# Altium PCB CT310高端控制盒核心板电路V1.2.PcbDoc (part 3 of 4)
Units mil, origin at the board's own origin, x right, y up, seen from the top; angles counter-clockwise.
Board outline 3735.76 x 4625 mil, 2 copper layers (TOP, BOTTOM), stack 10.4 mil thick; 194 components, 362 nets, 1084 pads, 348 vias.
Unrouted connection lines stored in the file: 16.
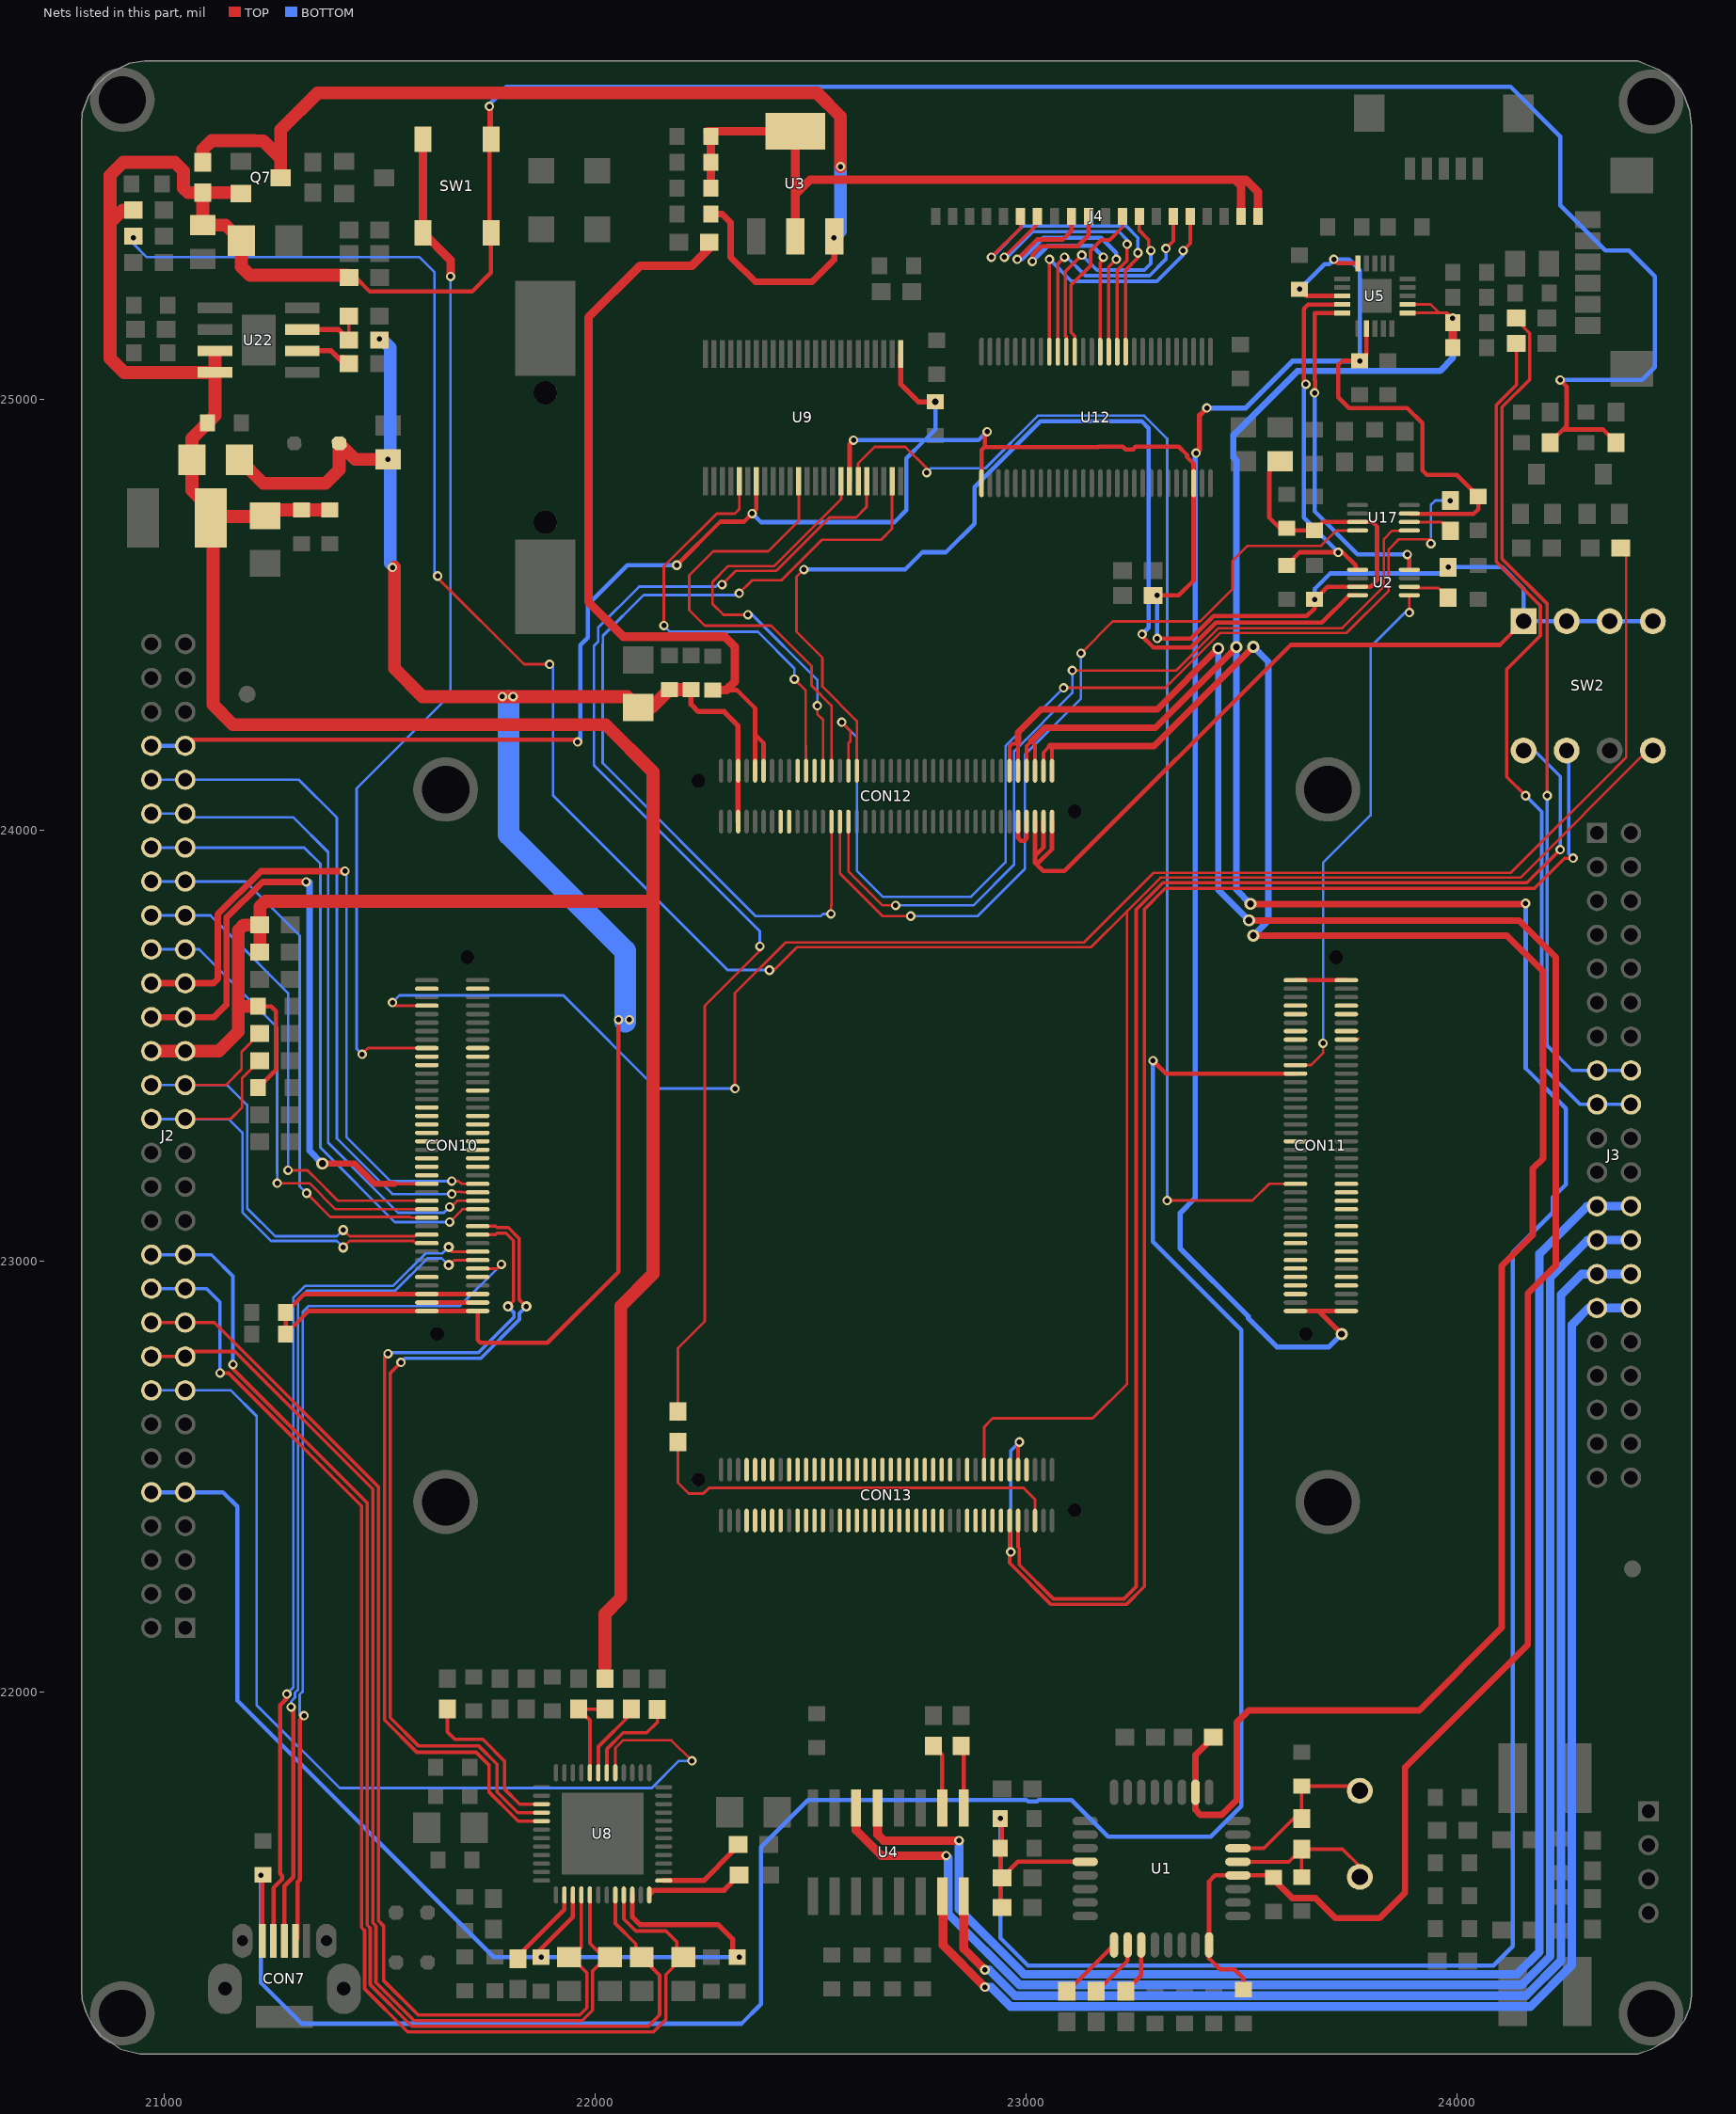
[diagram p3: the nets of this part, all layers, seen from the top]

## Via types
v1: diameter 22, hole 12, TOP to BOTTOM, tented both sides, 194 vias
v2: diameter 22, hole 12, TOP to BOTTOM, 92 vias
v3: diameter 28, hole 16, TOP to BOTTOM, 37 vias
v4: diameter 24, hole 12, TOP to BOTTOM, 17 vias
v5: diameter 50, hole 30, TOP to BOTTOM, tented both sides, 4 vias
v6: diameter 30, hole 20, TOP to BOTTOM, tented both sides, 3 vias
v7: diameter 40, hole 24, TOP to BOTTOM, 1 vias

## Nets (pads, with @x,y where several pads share a name; then routed paths per layer and width w, separated by ;. In a path a pad name is that pad's centre, name@x,y a point inside that pad or via, vN(x,y) a via of type N, cw(c..) or ccw(c..) an arc to the next point about the centre after c; other vN are vias at no path point) (continued)
NetR16_2: R16.2 U1.27 | length 122.4
  TOP w10: R16.2@23231.67,21305.43 23267.76,21341.52 U1.27@23267.76,21412.83
NetR17_1: R17.1 U1.26 | length 138.8
  TOP w10: R17.1@23163.33,21305.43 23165.43,21305.43 23236.26,21376.26 U1.26@23236.26,21412.83
NetR18_1: R18.1 U1.25 | length 154.3
  TOP w10: R18.1@23095,21305.43 23097.36,21305.43 U1.25@23204.76,21412.83
NetR20_2: R20.2 U4.9 | length 146.4
  TOP w10: R20.2@22850,21874.57 22855.96,21868.61 U4.9@22855.96,21730.67
NetR21_2: R21.2 U4.10 | length 152.6
  TOP w10: R21.2@22785,21874.57 22805.96,21853.61 U4.10@22805.96,21730.67
NetR22_2: R22.2 U17.6 | length 103.5
  TOP w6: U17.6@23890.04,24715.16 23964.41,24715.16 R22.2@23985,24694.57
NetR25_1: R25.1 U9.44 | length 2871.7
  TOP w6: R25.1@22192.85,22632.07 22192.85,22797.85 22255,22860 22255,23592.16 22382.85,23720.01 v2(22382.85,23730.57) ; 22303,24578 22327,24602 22420.64,24602 22544.75,24726.11 22606.11,24726.11 22630.5,24750.5 U9.44@22630.5,24810
  BOTTOM w6: v1(22295,24570) 22290,24575 22280.57,24565.57 22102.85,24565.57 22007.5,24470.22 22007.5,24437.29 21997.85,24427.65 21997.85,24150.57 22382.85,23765.57 v2(22382.85,23730.57)
NetR31_1: R31.1 R45.1 U8.32 | length 219.5
  TOP w8: U8.32@21988.33,21812.3 21988.33,21934.13 R45.1@21962.32,21960.14 R31.1@22023.21,21960.14
NetR33_1: R33.1 U8.2 | length 191.4
  TOP w10: R33.1@21817.85,21383.57 21929.27,21494.99 U8.2@21929.27,21528.84
NetR36_2: R36.2 U8.30 | length 227.9
  TOP w8: U8.30@22027.7,21812.3 22027.7,21867.38 22065.31,21905 22120,21905 22145,21930 R36.2@22145,21959.57
NetR39_2: R39.2 U8.13 | length 190.9
  TOP w12: U8.13@22159.59,21562.3 22252.3,21562.3 R39.2@22321.71,21631.71
NetR41_2: R41.2 U8.12 | length 226
  TOP w12: U8.12@22126.12,21528.84 22137.28,21540 22300,21540 R41.2@22333.57,21573.57
NetR42_2: R42.2 U8.31 | length 179.4
  TOP w8: U8.31@22008.01,21812.3 22008.01,21873.01 22084.11,21949.11 R42.2@22084.11,21960.14
NetR44_2: R44.2 U8.39 | length 357.7
  TOP w8: R44.2@21657.85,21960.14 21657.85,21907.15 21675,21890 21740,21890 21790,21840 21790,21775 21825.53,21739.47 21855,21739.47
NetR48_2: R48.2 U2.6 | length 100.6
  TOP w6: U2.6@23890.04,24565.16 23893.2,24562 23957.57,24562 R48.2@23980,24539.57
NetR131_2: R131.2 R135.1 U22.7 | length 173.7
  TOP w8: R131.2@21429,25137.85 R135.1@21429,25192.85
  TOP w12: U22.7@21320.49,25162.35 21404.5,25162.35 R131.2@21429,25137.85
NetR133_1: R133.1 U22.6 | length 140.5
  TOP w12: U22.6@21320.49,25112.35 21387.65,25112.35 R133.1@21425,25075 ; R133.1@21414.5,25097.35 R133.1@21429,25082.85
PWRDN_VCM: CON11.50 U9.43 | length 2963.6
  TOP w6: U9.43@22610.8,24810 22610.8,24851.5 22648.94,24889.64 22720.36,24889.64 22770,24840 v1(22770,24830) ; v2(23327.85,23140.57) 23525.88,23140.57 23564.63,23179.31 CON11.50@23625.65,23179.31
  BOTTOM w6: v1(22770,24830) 22780,24840 22906.11,24840 23028.11,24962 23274.46,24962 23327.85,24908.61 v2(23327.85,23140.57)
PWRON: CON10.63 SW1.3 SW1.4 | length 2402.3
  TOP w6: v2@21458.64,23480 21472.92,23494.28 CON10.63@21609.9,23494.28
  TOP w20: SW1.3@21601.26,25603.27 SW1.4@21601.26,25386.73 21665,25322.99 v1(21665,25285)
  BOTTOM w6: v2(21460,23480) 21447.21,23492.79 21447.21,24097.21 21665,24315 v1(21665,25285)
RS232_RXD1: J3.23 J3.24 U4.13 | length 3724.8
  TOP w20: U4.13@22655.96,21730.67 22655.96,21669.04 22670,21655 v1(22845,21655)
  BOTTOM w20: v1(22845,21655) 22845,21495.71 22995.71,21345 24140,21345 24192.01,21397.01 24192.01,23017.01 24302.31,23127.31 J3.23@24325.63,23127.31 J3.24@24404.37,23127.31
RS232_RXD2: J3.27 J3.28 U4.8 | length 3314.7
  TOP w20: U4.8@22855.96,21525.95 22855.96,21404.04 v1(22905,21355)
  BOTTOM w20: v1(22905,21355) 22915,21355 22975,21295 24160.71,21295 24242.01,21376.3 24242.01,22922.01 24289.83,22969.83 J3.27@24325.63,22969.83 J3.28@24404.37,22969.83
RS232_TXD1: J3.25 J3.26 U4.14 | length 3713.5
  TOP w20: U4.14@22605.96,21730.67 22605.96,21679.04 22665,21620 v1(22815,21620)
  BOTTOM w20: v1(22815,21620) 22820,21615 22820,21485.36 22985.36,21320 24150.36,21320 24217.01,21386.65 24217.01,22962.01 24303.57,23048.57 J3.25@24325.63,23048.57 J3.26@24404.37,23048.57
RS232_TXD2: J3.29 J3.30 U4.7 | length 3312
  TOP w20: U4.7@22805.96,21525.95 22807.69,21524.22 22807.69,21412.31 v1(22905,21315)
  BOTTOM w20: v1(22905,21315) 22919.64,21315 22964.64,21270 24171.07,21270 24267.01,21365.94 24267.01,22852.01 24306.09,22891.09 J3.29@24325.63,22891.09 J3.30@24404.37,22891.09
RX+: J2.19 J2.20 R34.1 U8.4 | length 2635
  TOP w8: J2.20@20970.63,22857.3 J2.19@21049.37,22857.3 21116.63,22857.3 21497.4,22476.53 21497.4,21469.43 21509.46,21457.36 21509.46,21330.54 21590,21250 21965,21250 21981.56,21266.56 21981.56,21347.81 21945,21384.37 21968.64,21408.01 U8.4@21968.64,21528.84
RX-: J2.17 J2.18 R35.1 U8.5 | length 2649.1
  TOP w8: J2.18@20970.63,22778.56 J2.17@21049.37,22778.56 21060.81,22790 21165,22790 21484.4,22470.6 21484.4,21464.04 21491.59,21456.85 21491.59,21325.77 21580.36,21237 21970.38,21237 21994.56,21261.17 21994.56,21352.26 22026.67,21384.37 22020,21384.37 21988.33,21416.04 U8.5@21988.33,21528.84
RXCLK+: J4.15 U12.39 | length 780.3
  TOP w8: v1(22920,25330) 22987.83,25397.83 J4.15@22987.83,25425 ; U12.39@23231.75,25110.52 23231.75,25300.08 23260,25328.33 v1(23260,25340)
  BOTTOM w8: v1(22920,25330) 22921.72,25330 22993.72,25402 23233,25402 23260,25375 v1(23260,25340)
RXCLK-: J4.14 U12.40 | length 713.3
  TOP w8: v1(22950,25330) 23027.2,25407.2 J4.14@23027.2,25425 ; U12.40@23212.07,25110.52 23212.07,25298.78 23235,25321.72 v1(23235,25360)
  BOTTOM w8: v1(22950,25330) 22956.72,25330 23015.72,25389 23216,25389 23235,25370 v1(23235,25360)
RXIN0+: J4.6 U12.47 | length 601.7
  TOP w8: U12.47@23074.27,25110.52 23074.27,25314.27 v1(23090,25330) ; v1(23325,25350) 23342.17,25367.17 J4.6@23342.17,25425
  BOTTOM w8: v1(23090,25330) 23095,25330 23138,25287 23287,25287 23325,25325 v1(23325,25350)
RXIN0-: J4.5 U12.48 | length 667.9
  TOP w8: U12.48@23054.59,25110.52 23054.59,25324.59 v1(23055,25325) ; v1(23365,25345) 23381.54,25361.54 J4.5@23381.54,25425
  BOTTOM w8: v1(23055,25325) 23106,25274 23304,25274 23365,25335 v1(23365,25345)
RXIN1+: J4.9 U12.45 | length 379.1
  TOP w8: U12.45@23113.64,25110.52 23113.64,25146.86 23105,25155.5 23105,25265 23150,25310 23150,25345 23175,25370 23195,25370 23224.06,25399.06 J4.9@23224.06,25425
RXIN1-: J4.8 U12.46 | length 545.7
  TOP w8: U12.46@23093.96,25110.52 23093.96,25145 23092,25146.96 23092,25297 v1(23130,25335) ; J4.8@23263.43,25425 23263.43,25391.57 23285,25370 23285,25345 v1(23290,25345)
  BOTTOM w8: v1(23130,25335) 23165,25300 23275,25300 23290,25315 v1(23290,25345)
RXIN2+: J4.12 U12.41 | length 689.3
  TOP w8: U12.41@23192.38,25110.52 23192.38,25307.38 v1(23210,25325)
  TOP w10: v1(22980,25325) 23026,25371 23086,25371 23105.94,25390.94 J4.12@23105.94,25425
  BOTTOM w10: v1(22980,25325) 22990.3,25325 23040.3,25375 23175,25375 23210,25340 v1(23210,25325)
RXIN2-: J4.11 U12.42 | length 622
  TOP w8: U12.42@23172.7,25110.52 23172.7,25317.7 23180,25325 v1(23180,25330)
  TOP w10: v1(23015,25320) 23015,25335 23035,25355 23120,25355 23145.31,25380.31 J4.11@23145.31,25425
  BOTTOM w10: v1(23015,25320) 23051,25356 23154,25356 v1(23180,25330)
SIM_DET: CON10.54
SPEED: J2.15 J2.16 U8.29 | length 2317.8
  TOP w6: U8.29@22047.38,21812.3 22047.38,21870.1 22064.85,21887.57 22177.43,21887.57 v2(22225,21840)
  BOTTOM w6: J2.16@20970.63,22699.82 J2.15@21049.37,22699.82 21155.18,22699.82 21215,22640 21215,21969.54 21407.54,21777 22132,21777 22195,21840 v2(22225,21840)
STM_LCD_ONOFF: J3.15 J3.16 R51.1 | length 1989.4
  TOP w8: R51.1@24138.48,25188.33 24138.48,25184.07 24169.13,25153.41 24169.13,25045.76 24105,24981.63 24105,24630 24210,24525 v1(24210,24080)
  BOTTOM w8: v1(24210,24080) 24210,23500 24267.73,23442.27 J3.15@24325.63,23442.27 J3.16@24404.37,23442.27
STM_LCD_PWM: J3.17 J3.18 R52.1 | length 2034.9
  TOP w8: R52.1@24138.48,25116.09 24138.48,25033.49 24092,24987.01 24092,24623 24194,24521 24194,24451.27 24116,24373.27 24116,24124 v1(24160,24080)
  BOTTOM w8: v1(24160,24080) 24197,24043 24197,23453 24286.47,23363.53 J3.17@24325.63,23363.53 J3.18@24404.37,23363.53
TP1_EN: CON12.50 R22.1 | length 2544.2
  TOP w6: v2(22572.85,24250.57) 22592.85,24230.57 22592.85,24206.26 22588.25,24201.65 CON12.50@22588.25,24137.98 ; v2(23087.85,24330.57) 23323.96,24330.57 23451.39,24458 23744.62,24458 23842,24555.38 23842,24652 23865,24675 v1@23940,24675 ; v1(23940,24665) v1@23945,24670 ; v1(23985,24765) R22.1@23985,24765.43
  BOTTOM w6: v2(22572.85,24250.57) 22607.85,24215.57 22607.85,23905.57 22667.85,23845.57 22872.85,23845.57 22952.85,23925.57 22952.85,24195.57 v2(23087.85,24330.57) ; v1(23940,24665) 23940,24755 23950,24765 v1(23985,24765)
TP1_INT: CON12.48 U2.4 | length 2582.1
  TOP w6: v1(22485,24605) 22467.85,24587.85 22467.85,24460.57 22527.85,24400.57 22527.85,24333.6 22607.93,24253.53 CON12.48@22607.93,24137.98
  TOP w10: v1(23270,24455) 23270,24450.3 23296.3,24424 23383.45,24424 23441.45,24482 23687,24482 23750.47,24545.47 U2.4@23769.96,24545.47
  BOTTOM w10: v1(22485,24605) 22720,24605 22760,24645 22814.7,24645 22881,24711.3 22881,24796.5 23033.5,24949 23269.08,24949 23285,24933.08 23285,24554.7 23284,24553.7 23284,24536.3 23285,24535.3 23285,24470 v1(23270,24455)
TP_IOCTL: CON12.53 U9.47 | length 2074.1
  TOP w6: v1(22335,24550) 22365,24580 22433.13,24580 22527.13,24674 22664,24674 22689.54,24699.54 U9.47@22689.54,24810 ; v2(22547.85,23805.57) 22547.85,23825.07 22548.88,23826.1 CON12.53@22548.88,24019.86
  BOTTOM w6: v1(22335,24550) 22330.57,24545.57 22112.85,24545.57 22018.5,24451.22 22018.5,24432.74 22017.85,24432.09 22017.85,24155.57 22372.85,23800.57 22523.85,23800.57 22528.85,23805.57 v2(22547.85,23805.57)
TSC_IRQ: C40.1 U2.1 U5.4 | length 903.4
  TOP w10: C40.1@23605,24614.37 23635.63,24645 v1(23725,24645) 23735,24645 23765,24615 23765,24609.49 U2.1@23769.96,24604.53 ; v1(23650,25035) 23645,25040 23645,25210 23655.32,25220.32 U5.4@23734.21,25220.32
  BOTTOM w10: v1(23650,25035) 23645,25040 23645,24725 v1(23725,24645)
TSC_RST: U2.8 U5.5 | length 808.3
  TOP w10: v1@23671,25015 23671,25043.7 23670.63,25044.07 23670.63,25200.63 U5.5@23734.21,25200.63 ; v1(23885,24640) 23890.04,24634.96 U2.8@23890.04,24604.53
  BOTTOM w10: v1@23670,25005 23670,24740 23770,24640 v1(23885,24640)
  other v1: 23670,25015
TX+: J2.23 J2.24 R37.1 U8.8 | length 3024.5
  TOP w8: v1(21160,22760) 21160,22750 21471.4,22438.6 21471.4,21458.66 21478.59,21451.46 21478.59,21320.38 21574.98,21224 22124,21224 22150,21250 22150,21342.7 R37.1@22108.33,21384.37 ; U8.8@22047.38,21528.84 22047.38,21462.62 22095,21415 R37.1@22095,21384.37
  BOTTOM w8: J2.24@20970.63,23014.78 J2.23@21049.37,23014.78 21110.22,23014.78 21160,22965 v1(21160,22760)
TX-: J2.21 J2.22 R38.1 U8.9 | length 3067.1
  TOP w8: v1(21130,22740) 21150,22740 21458.4,22431.6 21458.4,21453.27 21465.59,21446.08 21465.59,21311.02 21565.62,21211 22136,21211 22165,21240 22165,21344.37 R38.1@22205,21384.37 ; U8.9@22067.07,21528.84 22067.07,21472.93 22095,21445 22165,21445 22190,21420 R38.1@22190,21384.37
  BOTTOM w8: J2.22@20970.63,22936.04 J2.21@21049.37,22936.04 21098.96,22936.04 21130,22905 v1(21130,22740)
UART_RING: CON12.58
UH_DM2: CON10.22 U8.40 | length 1941.1
  TOP w8: v1(21550,22765) 21525,22740 21525,21940 21590,21875 21730,21875 21772.71,21832.29 21772.71,21767.71 21820.64,21719.78 U8.40@21876.12,21719.78 ; CON10.22@21728.01,23080.88 21769.83,23080.88 21773.17,23077.54 21798.88,23077.54 21823.85,23052.57 21823.85,22911.57 v4(21840.85,22894.57)
  BOTTOM w8: v1(21550,22765) 21559.57,22774.57 21735.24,22774.57 21824.85,22864.19 21824.85,22878.57 v4(21840.85,22894.57)
UH_DM3: CON10.19 J2.33 J2.34 R120.2 | length 1187.2
  TOP w6: J2.33@21049.37,23408.48 21143.48,23408.48 21180,23445 21180,23485.86 R120.2@21222.42,23528.29 ; v4(21415.85,23072.32) 21430.61,23057.57 21582.91,23057.57 21583.91,23058.57 21584.41,23058.57 21589.41,23063.57 21607.53,23063.57 CON10.19@21609.9,23061.21
  BOTTOM w6: J2.34@20970.63,23408.48 J2.33@21049.37,23408.48 21146.52,23408.48 21193,23362 21193,23122.56 21257.99,23057.57 21401.1,23057.57 v4(21415.85,23072.32)
UH_DP2: CON10.20 U8.41 | length 1949.9
  TOP w8: v1(21520,22785) 21512,22777 21512,21934.62 21586.62,21860 21724.5,21860 21754,21830.5 21754,21768.04 21754.66,21767.38 21810,21712.04 21821.94,21700.1 U8.41@21876.12,21700.1 ; CON10.20@21728.01,23061.21 21769.83,23061.21 21773.17,23064.54 21793.5,23064.54 21810.85,23047.19 21810.85,22907.23 v4(21798.2,22894.57)
  BOTTOM w8: v1@21527.43,22787.57 21729.85,22787.57 21811.85,22869.57 21811.85,22880.91 v4(21798.2,22894.57)
UH_DP3: CON10.17 J2.31 J2.32 R119.2 | length 1148.3
  TOP w6: J2.31@21049.37,23329.74 21049.63,23330 21155,23330 21181.03,23356.03 21181.03,23423.97 R119.2@21222.42,23465.36 ; v4(21415.85,23031.82) 21430.6,23046.57 21578.85,23046.57 21583.91,23041.51 CON10.17@21609.9,23041.51
  BOTTOM w6: J2.32@20970.63,23329.74 J2.31@21049.37,23329.74 21150.26,23329.74 21182,23298 21182,23113 21248.43,23046.57 21401.1,23046.57 v4(21415.85,23031.82)
V_BKCOIN: C128.1 CON12.70 CON12.72 R23.1 | length 1855.7
  TOP w10: 22315.1,24325.2 22329.8,24325.2 22371.71,24283.29 22371.71,24221.71 ; CON12.72@22371.71,24137.98 22371.71,24221.71 ; CON12.70@22391.4,24137.98 22391.4,24202.02 22371.71,24221.71
  TOP w20: R23.1@22265.43,25365 22265.43,25350.43 22225,25310 22105,25310 21985,25190 21985,24530 22066,24449 22301.41,24449 22325,24425.41 22325,24345 22305.2,24325.2 C128.1@22273.85,24325.2
VDD1V8_EXT: C24.1 C56.1 C57.1 C58.1 C80.1 CON12.1 CON12.3 CON12.5 J2.53 J2.54 R48.1 R86.1 SW2.5 SW2.6 SW2.7 SW2.8 U2.3 U9.1 U9.31 U9.42 U12.1 U12.26 U17.3 | length 7956.8
  TOP w10: J2.53@21049.37,24195.88 21063.49,24210 21955,24210 v1(21960,24205) ; v1(22190,24615) 22291,24716 22346,24716 v1(22365,24735) 22374.58,24744.58 U9.31@22374.58,24810 ; U9.42@22591.13,24810 22591.13,24896.13 v1(22600,24905) ; U12.1@22897.11,24805.4 22897.11,24882.11 22905,24890 ; v1(22910,24925) 22905,24920 22905,24890 ; CON12.5@23021.32,24019.86 23021.32,23940 ; CON12.3@23041,24019.86 23041,23959.68 23021.32,23940 ; CON12.1@23060.69,24019.86 23060.69,23955.69 23028.68,23923.68 23021.32,23923.68 ; R86.1@23295.43,24545 v1(23305,24545) 23355,24545 23389.23,24579.23 U12.26@23389.23,24805.4 23389.23,24851.07 23374,24866.3 23374,24871 23355,24890 23254.7,24890 23248.7,24884 23231.3,24884 23225.3,24890 23169.7,24890 23168.7,24889 22906,24889 22905,24890 ; v1(23305,24445) 23383.23,24445 23435.23,24497 23652,24497 23670,24515 v1(23670,24535.63) 23699.53,24565.16 U2.3@23769.96,24565.16 23800.16,24565.16 23815,24580 23815,24705 23804.84,24715.16 U17.3@23769.96,24715.16 23689.53,24715.16 C80.1@23670,24695.63 23610,24695.63 C57.1@23605,24700.63 23589.37,24700.63 23565,24725 23565,24831.54 C56.1@23590,24856.54 ; SW2.8@24155,24485 24100,24430 23614.7,24430 23089.7,23905 23040,23905 23021.32,23923.68 ; 23021.32,23923.68 23021.32,23940
  TOP w12: U9.1@22709.24,25105.28 22709.24,25035.76 22750.63,24994.37 v3(22790,24994.37)
  BOTTOM w10: J2.54@20970.63,24195.88 J2.53@21049.37,24195.88 ; v1(21960,24205) 21966,24211 21966,24429.73 21983.5,24447.23 21983.5,24523.5 22075,24615 v1(22190,24615) ; v1(22365,24735) 22385,24715 22695,24715 22723,24743 22723,24863.25 22764.75,24905 ; v1(22600,24905) 22764.75,24905 ; v3(22790,24994.37) 22790,24930.25 22764.75,24905 ; v1(22910,24925) 22890,24905 22764.75,24905 ; v1(23305,24445) v1(23305,24545) ; v1(23670,24535.63) 23670,24560 23706,24596 23965.57,24596 v1(23980,24610.43) 24104.57,24610.43 24155,24560 SW2.8@24155,24485 SW2.7@24255,24485 SW2.6@24355,24485 SW2.5@24455,24485
VDD12_5M: CON12.7 CON12.9 | length 101.7
  TOP w10: CON12.9@22981.95,24019.86 22981.95,23981.48 22987.85,23975.57 22996.34,23975.57 23001.63,23980.86 CON12.7@23001.63,24019.86
VDD18_A31: CON10.33
VDD18_CAM: C4.2 C5.2 C47.2 C48.2 CON12.6 CON12.8 R27.2 R28.2 U1.20 U5.11 U5.12 | length 7819.9
  TOP w6: U5.11@23885.79,25200.63 23959.37,25200.63 ; U5.12@23885.79,25220.32 23939.68,25220.32 23959.37,25200.63 ; v1(23990.63,25188.33) 23978.33,25200.63 23959.37,25200.63
  TOP w8: CON12.8@23001.63,24137.98 23001.63,24195.35 23012.85,24206.57 23021.32,24198.11 CON12.6@23021.32,24137.98
  TOP w10: C5.2@22940.63,21637.5 22940.63,21503.94 R27.2@22944.57,21500 ; v1(22940.63,21706.25) 22944.57,21702.31 C5.2@22944.57,21637.5 ; R28.2@22944.57,21568.75 22981.56,21605.75 U1.20@23137.83,21605.75
  TOP w15: 23012.85,24206.57 23043.85,24237.57 23300.96,24237.57 v3(23488.41,24425.02) ; v3(23521.38,23828.81) 24158.81,23828.81 v1(24160,23830)
  TOP w20: C47.2@23990.63,25130 v1(23990.63,25188.33)
  BOTTOM w10: v1(22940.63,21706.25) 22940.63,21429.37 23005,21365 24085,21365 24130,21410 24130,23020 24222.88,23112.88 24222.88,23147.57 24253,23177.7 24253,23354.43 24160,23447.43 v1(24160,23830)
  BOTTOM w15: v3(23521.38,23828.81) 23488.41,23861.78 v3(23488.41,24425.02) 23488.41,24858.36 23481.5,24865.27 23481.5,24916.5 23630.87,25065.87 23960.87,25065.87 23990.63,25095.63 v1(23990.63,25188.33)
VDD28_AF: CON12.2 CON12.4 R24.2 U1.10 | length 4845.6
  TOP w8: CON12.4@23041,24137.98 23041,24180.72 23055.85,24195.57 23060.69,24190.74 CON12.2@23060.69,24137.98
  TOP w15: 23055.85,24195.57 23297.85,24195.57 v3(23527.85,24425.57) ; R24.2@23435.43,21895 23393.74,21853.31 U1.10@23393.74,21767.17 23393.74,21726.26 23405,21715 23455,21715 23490,21750 23490,21930 23517.5,21957.5 23912.75,21957.5 24104.39,22149.14 24104.39,22989.14 24176.5,23061.25 24176.5,23214.73 24200,23238.23 24200,23672.21 24116.64,23755.57 v3(23527.85,23755.57)
  BOTTOM w15: v3(23527.85,23755.57) 23562.85,23790.57 23562.85,24390.57 v3(23527.85,24425.57)
VDD28_CAM: C6.2 C7.2 CON12.10 CON12.12 U1.4 U1.32 | length 5269.2
  TOP w8: CON12.12@22962.26,24137.98 22962.26,24193.98 22968.85,24200.57 22979.85,24200.57 22981.95,24202.67 CON12.10@22981.95,24137.98
  TOP w10: C7.2@23505,21309.37 23505,21335 23484,21356 23451,21356 23425.24,21381.76 U1.32@23425.24,21412.83 23425.24,21560.24 23439.25,21574.25 U1.4@23492.17,21574.25 23570.12,21574.25 C6.2@23575,21569.37
  TOP w15: 22981.95,24202.67 22981.95,24226.67 23035.85,24280.57 23305.07,24280.57 v3(23446.46,24421.96) ; v3(23517.85,23790.57) 24144.43,23790.57 24230,23705 24230,22990 24165,22925 24165,22110 23880,21825 23880,21535 23820,21475 23718.66,21475 23672.19,21521.48 23618.52,21521.48 23575,21565 C6.2@23575,21569.37
  BOTTOM w15: v3(23446.46,24421.96) 23446.46,23861.96 v3(23517.85,23790.57)
VDD33_A31: CON11.1 CON11.2 | length 118.1
  TOP w10: CON11.2@23625.65,23651.75 CON11.1@23743.76,23651.75
VDD33_LCD: C45.2 C46.2 C79.1 CON11.79 CON11.80 U5.3 U5.7 U5.20 U17.7 | length 4499.6
  TOP w10: CON11.80@23625.65,22884.04 23679.39,22884.04 CON11.79@23743.76,22884.04 ; v1(23635,25255.63) 23650.63,25240 U5.3@23734.21,25240 ; v1(23715,25325) 23724.21,25315.79 U5.20@23770.63,25315.79 ; U5.7@23790.31,25164.21 23790.31,25104.68 v1(23775,25089.37) 23734.37,25089.37 23725,25080 23725,25005 23750,24980 23885,24980 23920,24945 23920,24835 23930.63,24824.37 24000,24824.37 C79.1@24050,24774.37 24050,24745 24038.78,24733.78 23891.1,24733.78 U17.7@23890.04,24734.84
  TOP w12: v1(23395,24875) 23403,24883 23403,24963 v1(23420,24980) ; 23679.39,22884.04 v3(23732.85,22830.57)
  BOTTOM w10: v1(23635,25255.63) 23693.37,25314 23704,25314 v1(23715,25325) 23750,25325 23775,25300 v1(23775,25089.37)
  BOTTOM w12: v1(23395,24875) 23392.85,24872.85 23392.85,23145.57 23357.85,23110.57 23357.85,23029.77 23516,22871.63 23516,22867.42 23583.42,22800 23702.28,22800 v3(23732.85,22830.57) ; v1(23420,24980) 23510,24980 23619.37,25089.37 v1(23775,25089.37)
VDD50_EN: CON10.73 R2.2 | length 3987.2
  TOP w6: v2(21530,23600) 21537.31,23592.69 CON10.73@21609.9,23592.69 ; v1@22330,23400 v1(22325,23400) 22325,23621.87 22442.62,23739.49 23135.04,23739.49 23296.56,23901 24125.43,23901 24365,24140.57 24365,24141.26 24393,24169.26 24393,24642.43 R2.2@24380.43,24655
  BOTTOM w6: v2(21530,23600) 21546.57,23616.57 21926.85,23616.57 22142.85,23400.57 v1@22325,23400.57
VDD_ETHNET_1.8: C38.1 C39.1 J2.9 J2.10 U8.3 U8.10 | length 2567.4
  TOP w10: C38.1@21867.85,21396.57 21948.96,21477.67 U8.3@21948.96,21528.84
  TOP w12: U8.10@22086.75,21528.84 22086.75,21477.67 22104.42,21460 22285,21460 22320,21425 22320,21405
  BOTTOM w10: J2.10@20970.63,22463.6 J2.9@21049.37,22463.6 21136.4,22463.6 21170,22430 21170,21980 21765.63,21384.37 v1(21875,21384.37) 22334.37,21384.37 v1(22335,21385)
VDD_TF: CON10.31 J2.37 J2.38 | length 1535.5
  TOP w8: 21534.6,23179.31 CON10.31@21609.9,23179.31
  TOP w15: J2.38@20970.63,23565.96 J2.37@21049.37,23565.96 21115.96,23565.96 21145,23595 21145,23796.72 21228.28,23880 v1(21330,23880) ; v3(21367.47,23226.19) 21442.24,23226.19 21489.11,23179.31 21534.6,23179.31
  BOTTOM w15: v1@21337.85,23880 21337.85,23255.81 v3(21367.47,23226.19)
VSYS: C1.1 C2.1 C3.1 C61.1 C62.1 C87.1 C88.1 C154.1 F1.2 F2.1 J2.35 J2.36 Q7.2 R6.2 R8.1 R10.1 R31.2 R105.2 R106.2 R165.2 R173.2 SW1.1 SW1.2 U22.3 U22.4 | length 12372.9
  TOP w10: C88.1@21218.48,23402.43 21260,23443.94 21260,23580 21248.79,23591.21 C87.1@21218.48,23591.21 ; R8.1@21429.25,25282.85 21444.63,25282.85 21477.49,25250 21715,25250 21758.74,25293.74 SW1.1@21758.74,25386.73 21755,25390.47 v1(21755,25680) ; SW1.2@21758.74,25603.27 v1@21758.74,25676.26 ; R105.2@24216.67,24899.57 24247.1,24930 ; v1(24240,25045) 24255,25030 24255,24937.9 24247.1,24930 ; R106.2@24370,24899.57 24339.57,24930 24247.1,24930
  TOP w30: R6.2@20929,25439.28 20904.28,25439.28 20875,25410 ; J2.36@20970.63,23487.22 J2.35@21049.37,23487.22 21127.22,23487.22 21172.5,23532.5 21172.5,23593.71 ; F1.2@21105,24723.74 21109.23,24727.97 C1.1@21234.43,24727.97 ; F1.2@21105,24748.74 21064.88,24788.86 F2.1@21064.88,24860 21064.88,24909.25 C154.1@21100.63,24945 ; C154.1@21113.37,24957.74 C154.1@21100.63,24945 ; F1.2@21113.74,24765 21113.74,24291.26 21160,24245 22025,24245 22135,24135 22135,22970 22060,22895 22060,22217.94 22023.21,22181.16 22023.21,22060 ; U22.3@21118.37,25105 U22.4@21118.37,25062.35 ; Q7.2@21172.14,25479.57 R10.1@21090,25479.57 ; C87.1@21218.48,23591.21 21175,23591.21 21172.5,23593.71 ; R173.2@21222.42,23717.07 R165.2@21222.42,23780 ; C1.1@21234.43,24729.65 21248.21,24743.43 C3.1@21319.43,24743.43 C2.1@21384.43,24743.43 ; R8.1@21429.25,25282.85 21424.25,25287.85 21199.43,25287.85 21179.31,25307.97 C61.1@21179.31,25367.85 21142.79,25404.37 C62.1@21090,25404.37 R10.1@21090,25479.57 ; 22125,23835 21235,23835 21222.42,23822.42 R165.2@21222.42,23780 ; 20875,25410 20875,25095 20907.65,25062.35 U22.4@21118.37,25062.35 ; 20875,25410 20875,25520 20905,25550 21025,25550 21045,25530 21045,25490 21055.43,25479.57 R10.1@21090,25479.57 ; C154.1@21100.63,24945 21118.37,24962.74 U22.4@21118.37,25062.35 ; 21172.5,23593.71 21172.5,23767.5 21185,23780 R165.2@21222.42,23780
  BOTTOM w10: v1(21755,25680) 21755,25685 21795,25725 24125,25725 24240,25610 24240,25450 24345,25345 24400,25345 24460,25285 24460,25075 24430,25045 v1(24240,25045)
VSYS_K: C93.1 C112.1 C117.1 C118.1 C129.1 C130.1 CON10.1 CON10.2 CON10.3 CON10.4 CON10.5 CON10.6 CON12.75 CON12.76 F2.2 L7.2 R131.1 | length 5381.1
  TOP w10: CON10.3@21609.9,22903.72 CON10.4@21728.01,22903.72 ; CON10.6@21728.01,22923.41 CON10.5@21609.9,22923.41 21325.06,22923.41 C117.1@21282.22,22880.57 C112.1@21282.22,22830.57 21335.69,22884.04 CON10.1@21609.9,22884.04 CON10.2@21728.01,22884.04 21728.01,22816.99 21735,22810 21890,22810 22055,22975 v1(22055,23560)
  TOP w12: C129.1@22222.85,24326.52 22222.85,24292.15 22240,24275 22300,24275 22332.34,24242.66 CON12.76@22332.34,24137.98 CON12.75@22332.34,24019.86
  TOP w30: F2.2@21175.12,24860 21230.12,24805 21375,24805 21406.59,24836.59 L7.2@21406.59,24897.85 21443.82,24860.63 v1(21520,24860.63) ; v1@21535,24610 21535,24375 21600,24310 22074.88,24310 C118.1@22100,24284.88 22131.22,24284.88 C130.1@22172.85,24326.52 C129.1@22222.85,24326.52
  BOTTOM w10: v1@22060,23555 v1@22060,23560
  BOTTOM w30: v1(21500,25140) 21505,25140 21525,25120 21525,24620 v1@21535,24610
  BOTTOM w50: 21800,24300 21800,23990 22070,23720 22070,23555
  other v1: 22080,23560 21785,24310 21810,24310 21530,24610
VSYS_LCD: C41.2 Q7.3 R10.2 U3.3 | length 2463
  TOP w15: C41.2@22269.37,25430 22295,25430 22315,25410 22315,25330 22372.5,25272.5 22504.32,25272.5 22555.55,25323.73 U3.3@22555.55,25375
  TOP w30: R10.2@21090,25550.43 21090,25580 21110.54,25600.54 21210.34,25600.54 21210.87,25600 21230,25600 21270.93,25559.07 ; Q7.3@21270.93,25514.5 21270.93,25559.07 ; v1(22570,25540) 22570,25656.55 22515.55,25711 21356,25711 21270.93,25625.93 21270.93,25559.07
  BOTTOM w30: v1(22555,25375) 22570,25390 v1(22570,25540)
VSYS_LCD_3.3V: C42.2 C43.2 C44.2 J4.1 J4.2 U3.2 U3.4 | length 1850.2
  TOP w20: C43.2@22261.42,25622.05 U3.4@22465,25622.05 22465,25475 ; C44.2@22269.37,25490 C42.2@22269.37,25550 C43.2@22269.37,25610 C43.2@22281.42,25622.05 ; U3.2@22465,25377.95 22465,25475 ; J4.2@23499.65,25425 23499.65,25495.35 23490,25505 23515,25505 ; J4.1@23539.02,25425 23539.02,25480.98 23515,25505 ; 22465,25475 22500,25510 23510,25510 23515,25505
W_PMU_EN: CON13.8
WIFI_CLK: CON10.37
WIFI_CMD: CON10.38
WIFI_D0: CON10.41
WIFI_D1: CON10.40
WIFI_D2: CON10.43
WIFI_D3: CON10.42
WIFI_PWDN: CON10.36
WIFI_WOW: CON10.35
XADCAIN0: CON11.49
XADCAIN1: CON11.51
XADCAIN2: CON11.53
XADCAIN3: CON11.55
XCIFIELD: CON11.40
XCLKOUT: CON10.59
XEINT1_BAK: CON13.16
XEINT6: CON13.18 R5.2 SW2.4 | length 6634.3
  TOP w6: R5.2@20919.43,25362.85 20923.43,25362.85 20928.43,25367.85 R5.2@20947.93,25367.85 ; v1(21635,24590) 21635,24585.56 21835.56,24385 v1(21895,24385) ; v1(22405,23675) 22415,23675 22468.49,23728.49 23151.51,23728.49 23235,23811.97 ; CON13.18@22903.21,22515.93 22903.21,22615 22923.21,22635 23155,22635 23235,22715 23235,23811.97 ; SW2.4@24455,24185 24443.13,24185 24148.13,23890 23313.03,23890 23235,23811.97
  BOTTOM w6: v2(20929,25375) 20929,25361 20960,25330 21592.85,25330 21627.85,25295 21627.85,24597.15 v1(21635,24590) ; v1(21895,24385) 21902.85,24377.15 21902.85,24080.57 22307.85,23675.57 v1@22405,23675.57
XEINT7/GPX0_7: CON10.32 J2.39 J2.40 | length 1611.6
  TOP w6: v2(21667.85,23185.57) 21683.85,23185.57 21690.11,23179.31 CON10.32@21728.01,23179.31
  TOP w15: J2.40@20970.63,23644.7 J2.39@21049.37,23644.7 21114.7,23644.7 21125,23655 21125,23805 21225,23905 v1(21420,23905)
  BOTTOM w6: v1@21423.35,23905 21423.35,23288.24 21526.02,23185.57 v2(21667.85,23185.57)
XEINT14_BAK: CON13.22
XEINT18/KP_ROW2/ALV_DBG14: CON10.48
XEINT29/KP_ROW13/ALV_DBG25: CON10.49
XEINT30/HDMI_CEC/ALV_DBG26: CON11.22 U2.5 | length 1227.3
  TOP w6: CON11.22@23625.65,23454.91 23662.15,23454.91 23689.85,23482.62 v2(23689.85,23505.57) ; v1(23890,24505) v1(23890,24505) U2.5@23890.04,24545.47
  BOTTOM w6: v2(23689.85,23505.57) 23689.85,23924.85 23800,24035 23800,24425 23880,24505 v1(23890,24505)
XHDMITX0N: CON11.9
XHDMITX0P: CON11.7
XHDMITX1N: CON11.10
XHDMITX1P: CON11.8
XHDMITX2N: CON11.15 | length 3.7
  TOP w6: CON11.15@23769.2,23513.95 23771.82,23516.57
XHDMITX2P: CON11.13
XHDMITXCN: CON11.16
XHDMITXCP: CON11.14
XI2S0CDCLK/PCM_0_EXTCLK: CON11.71
XI2S0LRCK/PCM_0_FSYNC: CON11.70
XI2S0SCLK/PCM_0_SCLK: CON11.68
XI2S0SDI/PCM_0_SIN: CON11.74
XI2S0SDO_0/PCM_0_SOUT: CON11.72
XISPI2C1SCL: CON13.30
XISPI2C1SDA: CON13.32
XISPSPICLK: CON13.26
XISPSPICSN: CON13.19
XISPSPIMISO: CON13.21
XISPSPIMOSI: CON13.28
XJTCK: CON13.13
XJTDI: CON13.14
XJTDO: CON13.15
XJTMS: CON13.12
XJTRSTN: CON13.17
XM0ADDR0: CON13.65
XM0ADDR1: CON13.68
XM0ADDR2: CON13.67
XM0ADDR3: CON13.70
XM0ADDR4: CON13.69
XM0ADDR5: CON13.72
XM0ADDR6: CON13.71
XM0ADDR7: CON13.74
XM0BEN0: CON13.43
XM0CS0: CON13.73
XM0CS1: CON13.46
XM0DATA0: CON13.45
XM0DATA1: CON13.50
XM0DATA2: CON13.47
XM0DATA3: CON13.52
XM0DATA4: CON13.49
XM0DATA5: CON13.54
XM0DATA6: CON13.51
XM0DATA7: CON13.56
XM0DATA8: CON13.55
XM0DATA9: CON13.58
XM0DATA10: CON13.57
XM0DATA11: CON13.60
XM0DATA12: CON13.59
XM0DATA13: CON13.62
XM0DATA14: CON13.61
XM0DATA15: CON13.64
XM0DATA_RDN: CON13.44
XM0OEN: CON13.48
XM0WEN: CON13.41
XMIPI2LSDN0: CON11.64
XMIPI2LSDN1: CON11.67
XMIPI2LSDNCLK: CON11.61
XMIPI2LSDP0: CON11.62
XMIPI2LSDP1: CON11.65
XMIPI2LSDPCLK: CON11.59
XMIPIMDN0: CON13.29
XMIPIMDN1: CON13.33
XMIPIMDN2: CON13.38
XMIPIMDN3: CON13.42
XMIPIMDNCLK: CON13.37
XMIPIMDP0: CON13.27
XMIPIMDP1: CON13.31
XMIPIMDP2: CON13.36
XMIPIMDP3: CON13.40
XMIPIMDPCLK: CON13.35
XMMC2CLK: CON10.26 J2.47 J2.48 | length 1515.6
  TOP w6: v2(21662.85,23090.57) 21692.53,23120.25 CON10.26@21728.01,23120.25
  BOTTOM w6: J2.48@20970.63,23959.66 J2.47@21049.37,23959.66 21325.34,23959.66 21362.85,23922.15 21362.85,23263.34 21535.62,23090.57 v2(21662.85,23090.57)
XMMC2CMD: CON10.23 J2.45 J2.46 | length 1303.2
  TOP w6: v2(21330.85,23157.57) 21386.17,23102.25 21571.22,23102.25 21572.9,23100.58 CON10.23@21609.9,23100.58
  BOTTOM w6: J2.46@20970.63,23880.92 J2.45@21049.37,23880.92 21189.08,23880.92 21314.85,23755.15 21314.85,23173.57 v2(21330.85,23157.57)
XMMC2DATA0: CON10.28 J2.49 J2.50 | length 1547.7
  TOP w6: v2(21662.85,23125.57) 21666.14,23125.57 21680.51,23139.94 CON10.28@21728.01,23139.94
  BOTTOM w6: J2.50@20970.63,24038.4 J2.49@21049.37,24038.4 21057.77,24030 21300,24030 21380.85,23949.15 21380.85,23274.57 21543.29,23112.13 21649.42,23112.13 v2(21662.85,23125.57)
XMMC2DATA1: CON10.30 J2.51 J2.52 | length 1594.3
  TOP w6: v2(21667.85,23155.57) 21672.85,23160.57 21689.85,23160.57 21690.8,23159.62 CON10.30@21728.01,23159.62
  BOTTOM w6: J2.52@20970.63,24117.14 J2.51@21049.37,24117.14 21312.86,24117.14 21401,24029 21401,23284.42 21529.85,23155.57 v2(21667.85,23155.57)
XMMC2DATA2: CON10.25 J2.41 J2.42 | length 1100.9
  TOP w6: v2(21262.85,23180.57) 21337.85,23180.57 21398.17,23120.25 CON10.25@21609.9,23120.25
  BOTTOM w6: J2.42@20970.63,23723.44 J2.41@21049.37,23723.44 21081.56,23723.44 21262.66,23542.34 21262.66,23204.38 21262.85,23204.19 v2(21262.85,23180.57)
XMMC2DATA3: CON10.27 J2.43 J2.44 | length 1154.7
  TOP w6: v2(21287.85,23210.57) 21332.85,23210.57 21344.85,23198.57 21345.31,23198.57 21403.94,23139.94 CON10.27@21609.9,23139.94
  BOTTOM w6: J2.44@20970.63,23802.18 J2.43@21049.37,23802.18 21107.82,23802.18 21155,23755 21287.85,23622.15 v2(21287.85,23210.57)
XNRESET_EXT: CON10.61
XNRSOUT: CON10.64
XNWRESET: CON10.62
XOM2: CON13.9 SW2.1 | length 3312.6
  TOP w8: CON13.9@22981.95,22397.81 22981.95,22336.34 22985,22333.28 22985,22295 23064,22216 23227.62,22216 23256,22244.38 23256,23816 23318,23878 24163,23878 v1(24240,23955)
  BOTTOM w8: SW2.1@24155,24185 24180,24185 24240,24125 v1(24240,23955)
XOM3: CON13.10 CON13.11 SW2.2 | length 3669
  TOP w8: CON13.11@22962.26,22397.81 22962.26,22299.36 23058.62,22203 23233,22203 23275,22245 23275,23816.62 23323.38,23865 24180,23865 24250,23935 v1(24270,23935) ; CON13.10@22981.95,22515.93 22981.95,22576.95 v1(22985,22580)
  BOTTOM w8: v1(22965,22325) 22965,22560 v1(22985,22580) ; SW2.2@24255,24185 24260,24180 24260,23945 v1(24270,23935)
XPWMTOUT1: CON13.5 R25.2 | length 1018
  TOP w6: R25.2@22192.85,22599.07 22192.85,22485.57 22217.85,22460.57
  TOP w7: 22217.85,22460.57 22251.85,22460.57 22264.85,22473.57 22994.85,22473.57 23021.32,22447.11 CON13.5@23021.32,22397.81
XSPICLK0/I2C_4_SDA: CON11.73
XSPICSN0/I2C_4_SCL: CON11.76
XTAL1: C22.1 R46.2 U1.5 Y2.2 | length 401.2
  TOP w8: U1.5@23492.17,21605.75 23610.55,21605.75 R46.2@23640,21635.2 ; C22.1@23640,21570 R46.2@23640,21635.2 ; Y2.2@23775,21570.63 23775,21595 23734.8,21635.2 R46.2@23640,21635.2
XTAL2: C23.2 R46.1 U1.6 Y2.1 | length 390.9
  TOP w8: U1.6@23492.17,21637.24 23552.24,21637.24 23621.06,21706.06 R46.1@23640,21706.06 C23.2@23640,21781.26 23764.37,21781.26 Y2.1@23775,21770.63
XUCTS1: CON12.65
XUCTSN0: CON10.46
XUCTSN2/I2C_3_SDA: CON12.51 U17.4 | length 1987.8
  TOP w6: CON12.51@22568.56,24019.86 22568.56,23899.87 22667.85,23800.57 v2(22732.85,23800.57) ; v2(23128,24410.43) 23201.88,24484.31 23404.16,24484.31 23480,24560.15 23480,24625 23515,24660 23685,24660 23720.47,24695.47 U17.4@23769.96,24695.47
  BOTTOM w6: v2(22732.85,23800.57) 22887.85,23800.57 22997.85,23910.57 22997.85,24175.57 23127.85,24305.57 23127.85,24391.28 23128,24391.43 v2(23128,24410.43)
XUHOSTDATA0: CON10.77
XUHOSTDATA1_EXT: CON10.9
XUHOSTSTROBE0: CON10.78
XUHOSTSTROBE1_EXT: CON10.10
XUOTGDM: CON7.2 CON10.16 | length 1998.3
  TOP w7: v4(21660.59,23032.52) 21660.59,23028.83 21667.59,23021.83 CON10.16@21728.01,23021.83
  TOP w10: CON7.2@21253.84,21422.42 21253.84,21545.05 21274,21565.21 21274,21573.57 21270,21577.57 21270,21969.7 21285,21984.7 v1(21285,21995)
  BOTTOM w6: v1(21285,21995) 21300,22010 21300,22915 21327.57,22942.57 21531.85,22942.57 21606.85,23017.57 21645.47,23017.57 21649.58,23021.68 21649.75,23021.68 v4(21660.59,23032.52)
XUOTGDP: CON7.3 CON10.14 | length 1973.2
  TOP w7: v4(21660.59,22990.92) 21662.8,22990.92 21674.03,23002.15 CON10.14@21728.01,23002.15
  TOP w10: CON7.3@21279.43,21422.42 21279.43,21549.43 21300,21570 21300,21960 v1(21295,21965)
  BOTTOM w6: v1(21295,21965) 21295,21978.13 21304,21987.13 21304,21998.44 21311,22005.44 21311,22910.44 21332.13,22931.57 21536.41,22931.57 21611.41,23006.57 21644.85,23006.57 21660.5,22990.92 v4(21660.59,22990.92)
XUOTGID: CON7.4 CON10.12 | length 2046.4
  TOP w6: CON10.12@21728.01,22982.47 21772.75,22982.47 v2(21782.85,22992.57)
  TOP w10: CON7.4@21305.02,21422.42 21310,21427.4 21310,21558.79 21315,21563.79 21315,21935 v1(21325,21945)
  BOTTOM w6: v1(21325,21945) 21315,21945 21315,21993.89 21322,22000.89 21322,22882 21335.57,22895.57 21685.85,22895.57 v2(21782.85,22992.57)
XUOTGVBUS: C89.2 CON7.1 CON11.24 | length 5371
  TOP w10: CON7.1@21228.25,21422.42 C89.2@21228.25,21573.88 ; v1@23295,23465.57 23325.36,23435.21 CON11.24@23625.65,23435.21
  BOTTOM w10: v1(21225,21575) 21225,21325 21320,21230 22340,21230 22385,21275 22385,21640 22494.43,21749.43 23001.08,21749.43 23005.08,21745.43 23025.79,21745.43 23029.79,21749.43 23105.57,21749.43 23191,21664 23429,21664 23500,21735 23500,22840 23295,23045 v1(23295,23465)
XURTS1: CON12.62
XURTSN0: CON10.47
XURTSN2/I2C_3_SCL: CON12.49 U17.5 | length 2033.5
  TOP w6: CON12.49@22588.25,24019.86 22588.25,23905.17 22667.85,23825.57 v2(22697.85,23825.57) ; v2(23107.85,24370.57) 23348.4,24370.57 23446.83,24469 23734,24469 23831,24566 23831,24676 23850,24695 23865,24695
  BOTTOM w6: v2(22697.85,23825.57) 22877.85,23825.57 22972.85,23920.57 22972.85,24183.57 23107.85,24318.57 v2(23107.85,24370.57)
XURXD0: CON10.44
XURXD1: CON12.60 U9.29 | length 1024.9
  TOP w6: v1(22160,24475) 22160,24611.87 22282.78,24734.65 22324.65,24734.65 22335.21,24745.21 U9.29@22335.21,24810 ; v2(22462.85,24350.57) 22489.19,24324.24 22489.19,24197.28 22489.82,24196.65 CON12.60@22489.82,24137.98
  BOTTOM w6: v1(22160,24475) 22174.43,24460.57 22377.85,24460.57 22462.85,24375.57 v2(22462.85,24350.57)
XURXD2/UART_AUDIO_RXD: CON12.54 U9.36 | length 1078.4
  TOP w6: U9.36@22473.01,24810 22473.01,24718.01 22402,24647 22274.57,24647 22219,24591.43 22219,24511 22255,24475 22408.42,24475 22502.85,24380.57 22502.85,24335.57 22548.88,24289.54 CON12.54@22548.88,24137.98
XUTXD0: CON10.45
XUTXD1: CON12.63
XUTXD2/UART_AUDIO_TXD: CON12.56 U9.41 | length 1003.9
  TOP w6: v1(22355,24500) 22298.13,24500 22272.87,24525.26 22272.87,24576 22309.87,24613 22416.08,24613 22571.43,24768.35 U9.41@22571.43,24810 ; v2(22516.21,24288.93) 22516.21,24269.93 22529.19,24256.95 CON12.56@22529.19,24137.98
  BOTTOM w6: v1@22355,24501.47 22363.53,24501.47 22516.21,24348.79 v2(22516.21,24288.93)
XVSYS_OE: CON13.39
XVVSYNC_LDI: CON13.34
pads on no net: "BAT1. " "CON10. " "CON11. " "CON12. " "CON13. " CON12.11 CON12.13 CON12.71 CON12.73 H5.1 H6.1 H7.1 H8.1 H10.1 H12.1 H13.1 H14.1 J2.25 J2.26 J2.55 J2.56 J2.57 J2.58 J2.59 J2.60 J3.1 J3.2 J3.3 J3.4 J3.5 J3.6 J3.19 J3.20 J3.21 J3.22 J3.31 J3.32 J4.17 J4.18 J4.19 J4.20 J5.0 J6.0 U1.23 U5.8 U5.19 U8.11 U8.14 U8.15 U8.17 U8.18 U8.19 U8.23 U8.25 U8.26 U8.27 U8.33 U8.35 U8.36 U9.14 U9.19 U9.22 U9.23 U9.26 U9.27 U9.30 U9.35 U12.37 U12.38 U22.8

## Polygon pours and split planes (outlines as drawn)
no net on Top Overlay (solid): 23547.3,23870.89 ccw(c23457.85,23870.89) 23457.85,23960.33 ccw(c23457.85,23870.89) 23368.41,23870.89 ccw(c23457.85,23870.89) 23457.85,23781.44 ccw(c23457.85,23870.89) 23547.3,23870.89
NetL7_1 on TOP "TOP-N64899462" (solid, pour order 7): 21279.43,25072.85 21279.43,25012.85 21279.43,24972.85 21279.43,24897.85 21289.43,24887.85 21319.43,24887.85 21324.43,24892.85 21324.43,24967.85 21339.43,24982.85 21339.43,25012.85 21339.43,25017.85 21369.43,25047.85 21369.43,25067.85 21364.43,25072.85 21279.43,25072.85
DC33V on TOP "TOP-DC33V" (solid, pour order 15): 23059.85,22338.57 23059.85,22542.57 23133.85,22542.57 23133.85,22456.57 23087.85,22456.57 23087.85,22392.57 23120.85,22392.57 23120.85,22338.57 23059.85,22338.57
GND on TOP "TOP-GND 25" (solid, pour order 91): 183 vertices, not listed, extent 22348.34,23960.86 23304.34,24178.07
GND on TOP "TOP-GND 28" (solid, pour order 97): 23704.81,23493.84 23704.82,23493.84 23704.94,23493.96 23705.08,23494.07 23705.22,23494.17 23705.37,23494.25 23705.53,23494.32 23705.7,23494.38 23705.87,23494.42 23706.04,23494.45 23706.22,23494.46 23706.39,23494.46 23706.56,23494.44 23706.73,23494.4 23706.9,23494.36 23707.06,23494.29 23707.22,23494.22 23707.37,23494.13 23707.51,23494.02 23707.64,23493.91 23707.76,23493.78 23707.87,23493.65 23707.97,23493.5 23708.05,23493.35 23708.12,23493.19 23708.18,23493.02 23708.22,23492.85 23708.25,23492.68 23708.26,23492.51 23708.26,23492.46 23708.26,23426.69 23708.25,23426.34 23708.2,23426 23708.13,23425.66 23708.02,23425.32 23707.89,23425 23707.73,23424.69 23707.54,23424.4 23707.33,23424.12 23707.09,23423.86 23706.83,23423.63 23706.56,23423.41 23706.26,23423.23 23705.95,23423.07 23705.63,23422.93 23705.3,23422.83 23704.96,23422.75 23704.61,23422.71 23704.26,23422.69 23703.91,23422.71 23703.57,23422.75 23703.23,23422.83 23702.89,23422.93 23702.57,23423.07 23702.26,23423.23 23701.97,23423.41 23701.69,23423.63 23701.43,23423.86 23701.41,23423.89 23700.2,23425.02 23698.89,23426.04 23697.5,23426.94 23696.04,23427.72 23694.51,23428.37 23692.93,23428.88 23691.32,23429.25 23689.68,23429.49 23688.02,23429.57 23686.37,23429.51 23684.72,23429.31 23683.1,23428.97 23681.51,23428.48 23679.98,23427.86 23678.5,23427.11 23677.09,23426.23 23675.77,23425.24 23674.54,23424.13 23673.41,23422.91 23672.39,23421.61 23671.48,23420.22 23670.7,23418.75 23670.06,23417.23 23669.79,23416.47 23669.64,23416.02 23667.97,23414.35 23667.72,23414.12 23667.44,23413.9 23667.15,23413.72 23666.84,23413.55 23666.51,23413.42 23666.18,23413.32 23665.84,23413.24 23665.49,23413.2 23665.15,23413.18 23664.8,23413.2 23664.45,23413.24 23664.11,23413.32 23663.78,23413.42 23663.45,23413.56 23663.15,23413.72 23662.85,23413.9 23662.57,23414.12 23662.32,23414.35 23662.08,23414.61 23661.87,23414.89 23661.68,23415.18 23661.52,23415.49 23661.39,23415.81 23661.28,23416.15 23661.21,23416.49 23661.16,23416.83 23661.15,23417.18 23661.15,23441.9 23667.53,23441.9 23702.86,23477.23 23702.86,23491.69 23703.23,23492.06 23704.35,23493.28 23704.81,23493.84
GND on TOP "TOP-GND 30" (solid, pour order 101): 230 vertices, not listed, extent 21645.4,23195.3 21692.51,23360.84
GND on TOP "TOP-GND 32" (solid, pour order 105): 21409.32,23152.95 21364.91,23197.36 21364.67,23197.62 21364.46,23197.89 21364.27,23198.19 21364.11,23198.5 21363.98,23198.82 21363.87,23199.15 21363.8,23199.49 21363.75,23199.84 21363.74,23200.19 21363.75,23200.54 21363.8,23200.88 21363.87,23201.22 21363.98,23201.56 21364.11,23201.88 21364.27,23202.19 21364.46,23202.48 21364.67,23202.76 21364.91,23203.02 21365.17,23203.25 21365.44,23203.46 21365.74,23203.65 21366.05,23203.81 21366.37,23203.95 21366.7,23204.05 21367.04,23204.13 21367.39,23204.17 21367.7,23204.19 21369.61,23204.29 21371.51,23204.56 21373.38,23205 21375.21,23205.59 21376.97,23206.34 21378.67,23207.25 21380.28,23208.3 21380.81,23208.69 21434.99,23208.69 21481.86,23161.81 21534.6,23161.81 21536.12,23161.88 21537.64,23162.08 21539.13,23162.41 21540.58,23162.87 21542,23163.45 21543.35,23164.16 21544.64,23164.98 21545.1,23165.31 21574.4,23165.31 21574.4,23152.95 21409.32,23152.95

## Text inside footprints (layer, text, board x,y; h text height)
CON12: PIN_NUMBER "75" at 22312.34,23919.86 h25 r180; PIN_NUMBER "76" at 22312.34,24237.98 h25 r180; PIN_NUMBER "69" at 22371.4,23919.86 h25 r180; PIN_NUMBER "11" at 22942.26,23919.86 h25 r180; PIN_NUMBER "13" at 22922.58,23919.86 h25 r180; PIN_NUMBER "71" at 22351.71,23919.86 h25 r180; PIN_NUMBER "73" at 22332.03,23919.86 h25 r180; PIN_NUMBER "64" at 22430.45,24237.98 h25 r180; PIN_NUMBER "65" at 22410.77,23919.86 h25 r180; PIN_NUMBER "62" at 22450.14,24237.98 h25 r180; PIN_NUMBER "58" at 22489.51,24237.98 h25 r180; PIN_NUMBER "60" at 22469.82,24237.98 h25 r180; PIN_NUMBER "63" at 22430.45,23919.86 h25 r180; PIN_NUMBER "39" at 22666.67,23919.86 h25 r180; PIN_NUMBER "38" at 22686.36,24237.98 h25 r180; PIN_NUMBER "48" at 22587.93,24237.98 h25 r180; PIN_NUMBER "3" at 23031,23919.86 h25 r180; PIN_NUMBER "1" at 23050.69,23919.86 h25 r180; PIN_NUMBER "5" at 23011.32,23919.86 h25 r180; PIN_NUMBER "19" at 22863.52,23919.86 h25 r180; PIN_NUMBER "66" at 22410.77,24237.98 h25 r180; PIN_NUMBER "21" at 22843.84,23919.86 h25 r180; PIN_NUMBER "20" at 22863.52,24237.98 h25 r180; PIN_NUMBER "18" at 22883.21,24237.98 h25 r180; PIN_NUMBER "46" at 22607.62,24237.98 h25 r180; PIN_NUMBER "9" at 22971.95,23919.86 h25 r180; PIN_NUMBER "7" at 22991.63,23919.86 h25 r180; PIN_NUMBER "8" at 22991.63,24237.98 h25 r180; PIN_NUMBER "6" at 23011.32,24237.98 h25 r180; PIN_NUMBER "59" at 22469.82,23919.86 h25 r180; PIN_NUMBER "4" at 23031,24237.98 h25 r180; PIN_NUMBER "2" at 23050.69,24237.98 h25 r180; PIN_NUMBER "49" at 22568.25,23919.86 h25 r180; PIN_NUMBER "12" at 22942.26,24237.98 h25 r180; PIN_NUMBER "10" at 22961.95,24237.98 h25 r180; PIN_NUMBER "56" at 22509.19,24237.98 h25 r180; PIN_NUMBER "54" at 22528.88,24237.98 h25 r180; PIN_NUMBER "61" at 22450.14,23919.86 h25 r180; PIN_NUMBER "52" at 22548.56,24237.98 h25 r180; PIN_NUMBER "55" at 22509.19,23919.86 h25 r180; PIN_NUMBER "16" at 22902.89,24237.98 h25 r180; PIN_NUMBER "79" at 22272.97,23919.86 h25 r180; PIN_NUMBER "74" at 22332.03,24237.98 h25 r180; PIN_NUMBER "80" at 22272.97,24237.98 h25 r180; PIN_NUMBER "77" at 22292.66,23919.86 h25 r180; PIN_NUMBER "78" at 22292.66,24237.98 h25 r180; PIN_NUMBER "47" at 22587.93,23919.86 h25 r180; PIN_NUMBER "14" at 22922.58,24237.98 h25 r180; PIN_NUMBER "17" at 22883.21,23919.86 h25 r180; PIN_NUMBER "15" at 22902.89,23919.86 h25 r180; PIN_NUMBER "42" at 22646.99,24237.98 h25 r180; PIN_NUMBER "32" at 22745.41,24237.98 h25 r180; PIN_NUMBER "35" at 22706.04,23919.86 h25 r180; PIN_NUMBER "43" at 22627.3,23919.86 h25 r180; PIN_NUMBER "44" at 22627.3,24237.98 h25 r180; PIN_NUMBER "33" at 22725.73,23919.86 h25 r180; PIN_NUMBER "45" at 22607.62,23919.86 h25 r180; PIN_NUMBER "41" at 22646.99,23919.86 h25 r180; PIN_NUMBER "37" at 22686.36,23919.86 h25 r180; PIN_NUMBER "36" at 22706.04,24237.98 h25 r180; PIN_NUMBER "34" at 22725.73,24237.98 h25 r180; PIN_NUMBER "40" at 22666.67,24237.98 h25 r180; PIN_NUMBER "57" at 22489.51,23919.86 h25 r180; PIN_NUMBER "25" at 22804.47,23919.86 h25 r180; PIN_NUMBER "24" at 22824.15,24237.98 h25 r180; PIN_NUMBER "27" at 22784.78,23919.86 h25 r180; PIN_NUMBER "26" at 22804.47,24237.98 h25 r180; PIN_NUMBER "29" at 22765.1,23919.86 h25 r180; PIN_NUMBER "28" at 22784.78,24237.98 h25 r180; PIN_NUMBER "30" at 22765.1,24237.98 h25 r180; PIN_NUMBER "53" at 22528.88,23919.86 h25 r180; PIN_NUMBER "22" at 22843.84,24237.98 h25 r180; PIN_NUMBER "70" at 22371.4,24237.98 h25 r180; PIN_NUMBER "72" at 22351.71,24237.98 h25 r180; PIN_NUMBER "67" at 22391.08,23919.86 h25 r180; PIN_NUMBER "51" at 22548.56,23919.86 h25 r180; PIN_NUMBER "31" at 22745.41,23919.86 h25 r180; PIN_NUMBER "23" at 22824.15,23919.86 h25 r180; PIN_NUMBER "50" at 22568.25,24237.98 h25 r180; PIN_NUMBER "68" at 22391.08,24237.98 h25 r180